# Altium PCB 990130_PCB.PcbDoc
Units mil, origin at the board's own origin, x right, y up, seen from the top; angles counter-clockwise.
Board outline 6000 x 4000 mil, 2 copper layers (Top Layer, Bottom Layer); 36 components, 27 nets, 161 pads, 0 vias.
Unrouted connection lines stored in the file: 57.
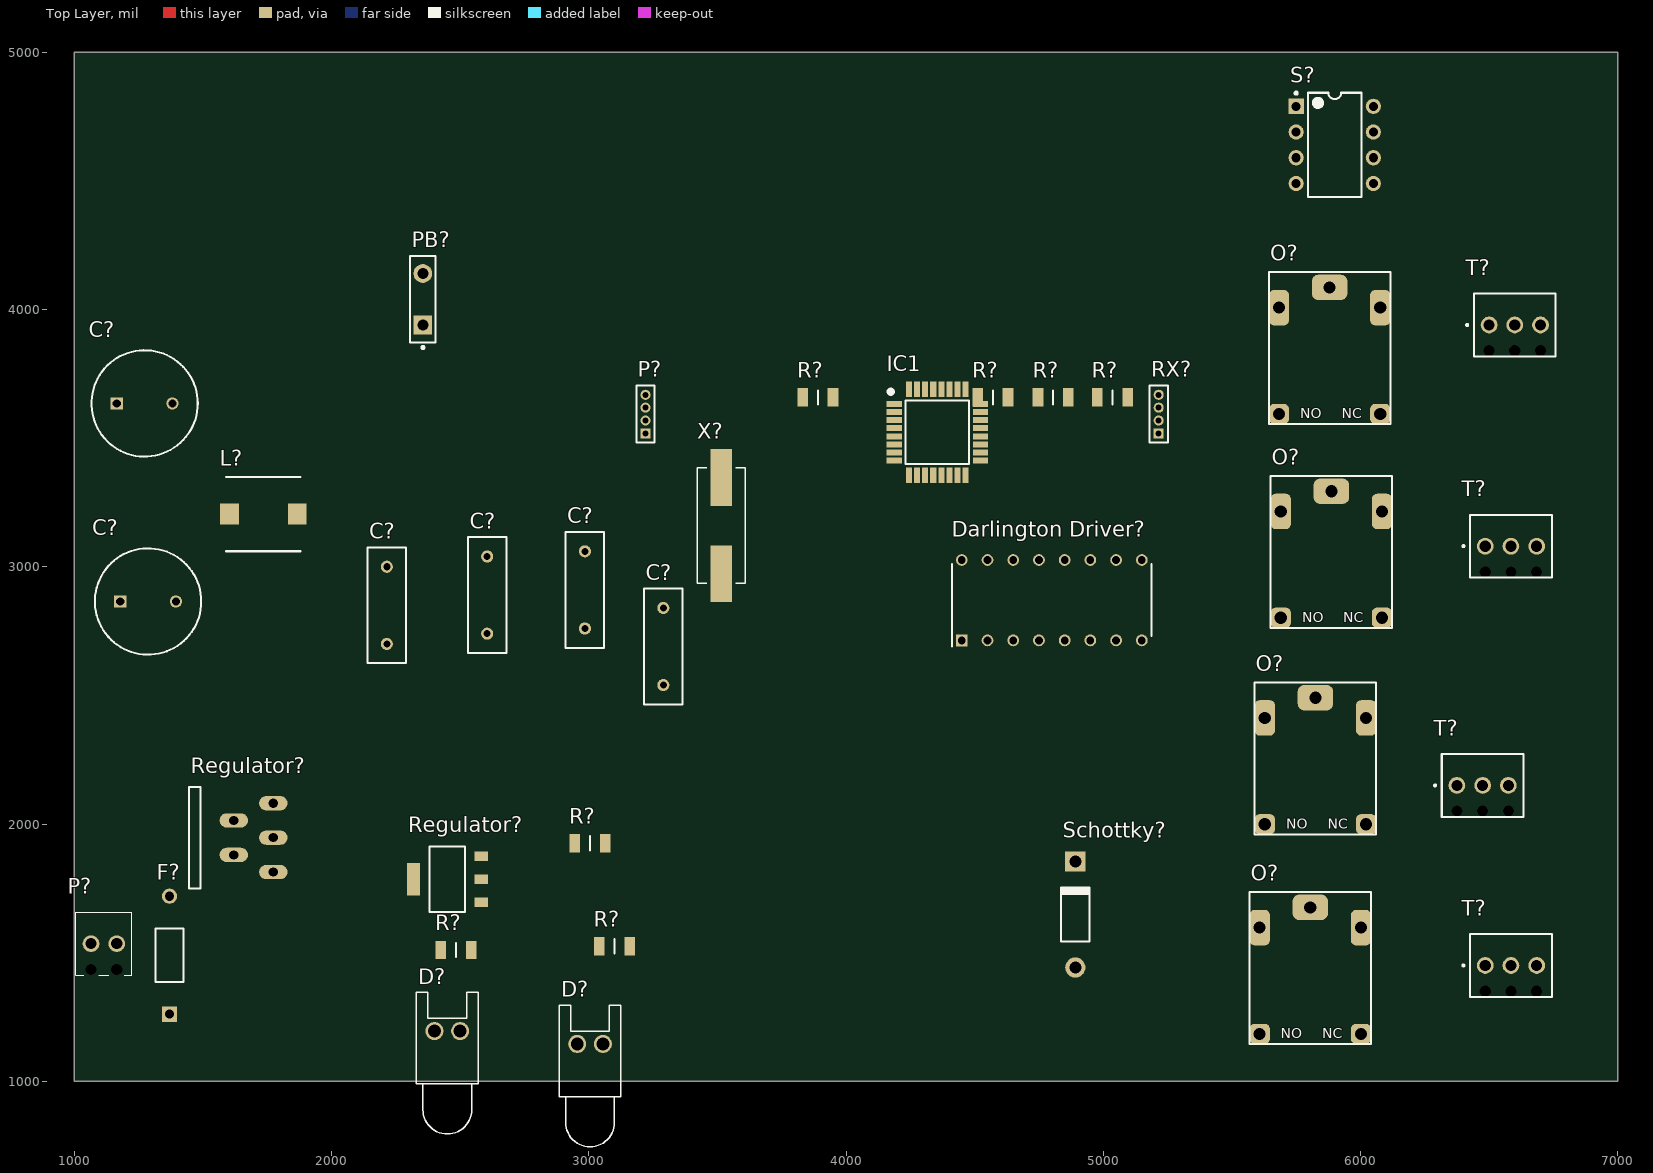
[diagram p0: Top Layer view]
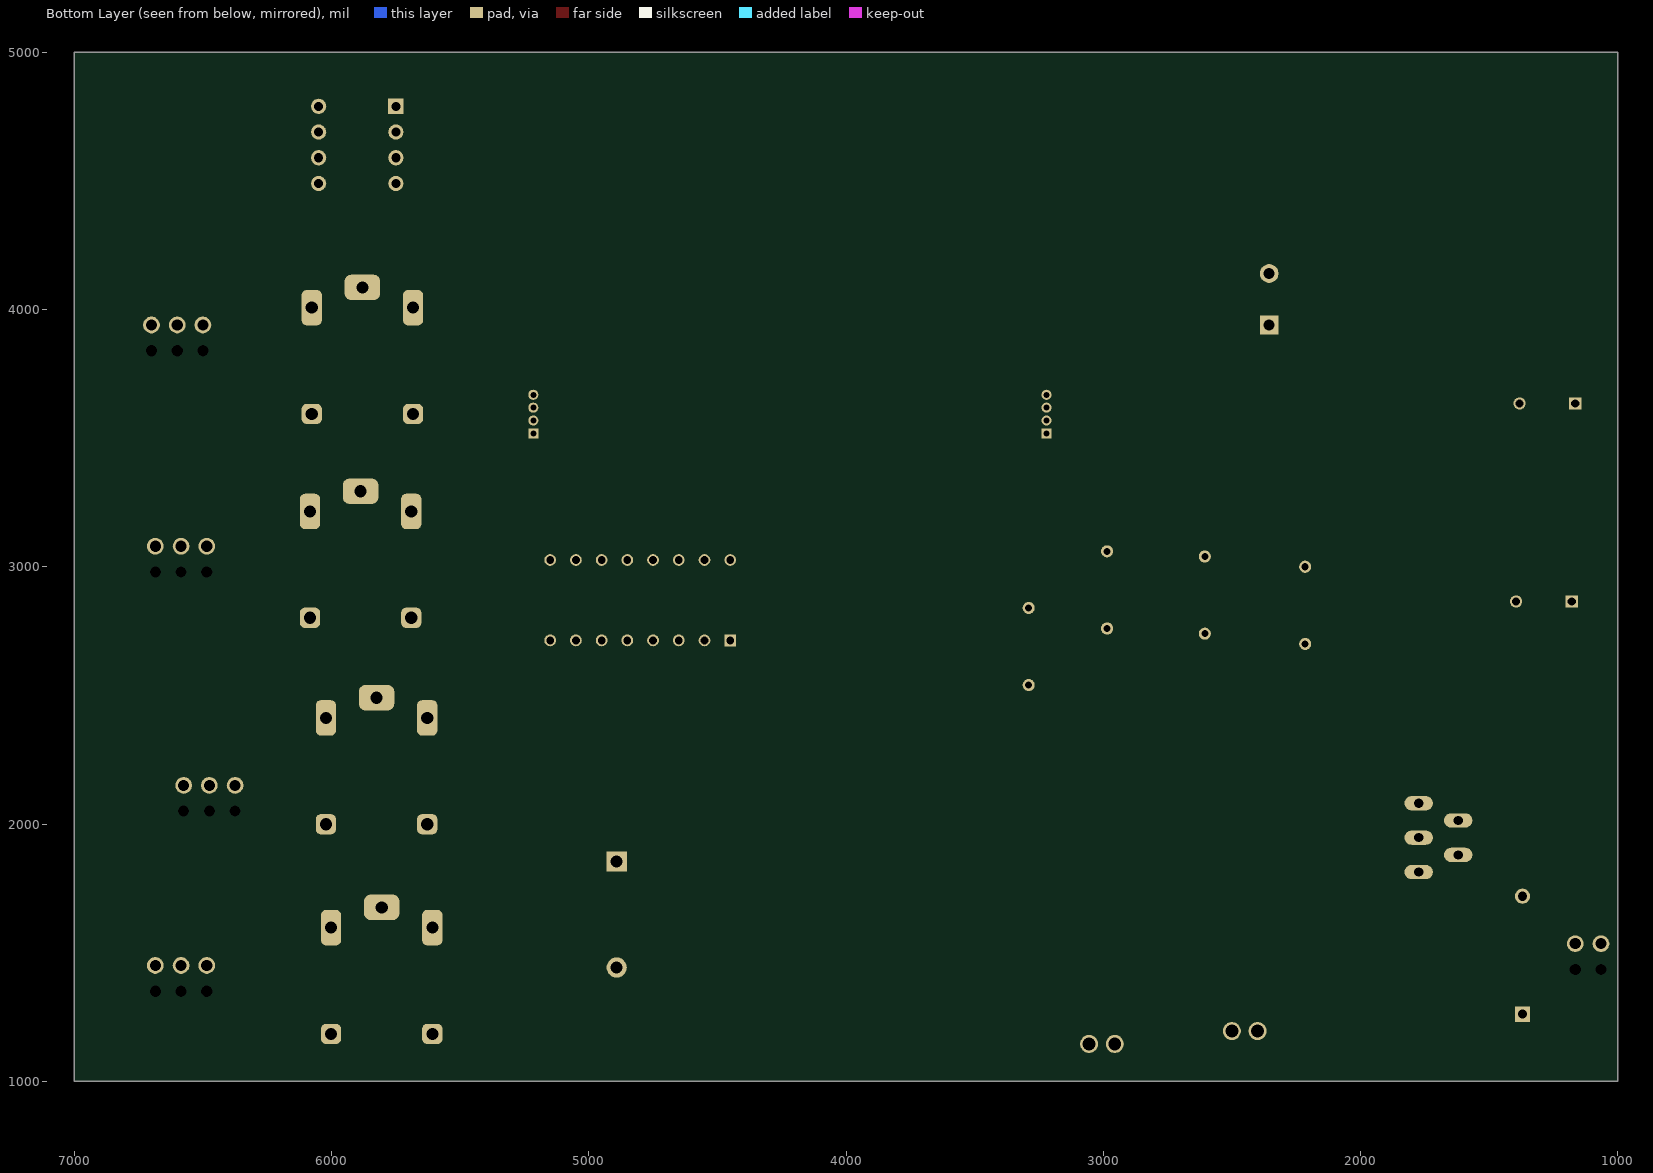
[diagram p1: Bottom Layer view, seen from below]

## Layer stack, top to bottom
Top Solder: solder mask 0.4, Solder Resist, Dk 3.5
Top Layer: signal copper 1.4
Dielectric 1: dielectric 12.6, FR-4, Dk 4.8
Bottom Layer: signal copper 1.4
Bottom Solder: solder mask 0.4, Solder Resist, Dk 3.5

## Board outline
1000,1000 7000,1000 7000,5000 1000,5000

## Design rules (kind name [scope] priority, off if disabled: settings)
Clearance [All] p1: gap=10 ignorepadtopadclearanceinfootprint=FALSE except(0: Arc-Hole Track-Hole SMDPad-Hole THPad-Hole Via-Hole Fill-Hole Poly-Hole Region-Hole Text-Hole)
PolygonConnect [All] p1: connectstyle=Relief reliefconductorwidth=10 reliefentries=4 polygonreliefangle="90 Angle" airgapwidth=10
RoutingVias [All] p1: holewidth=28 width=50 viastyle="Through Hole" minholewidth=28 minwidth=50 maxholewidth=28 maxwidth=50
SolderMaskExpansion [All] p1: expansion=4
Width [All] p1: maxlimit=10 minlimit=10 preferedwidth=10
30 further rules are at their usual default settings.

## Classes and differential pairs
component class 990130_Schematic: C? D? "Darlington Driver?" F? IC1 L? O? P? PB? R? Regulator? RX? S? Schottky? T? X?

## Components (designator, comment, footprint, x,y, rotation, side; value= is the part's Value field where it differs from the comment)
C? "Cap" RAD-0.3 3290,2690 r90 top value=20pF
C? "Cap" RAD-0.3 2985,2910 r90 top value=20pF
C? "Cap" RAD-0.3 2605,2890 r90 top
C? "Cap" RAD-0.3 2215,2850 r90 top value=10pF
C? "1000uF" CAPPRD550W60D1050H2150 1178.46,2865 r0 top
C? "100uF" CAPPRD550W60D1050H2150 1165,3635 r0 top
D? "LED0" LED-0 3005,1145 r0 top
D? "LED0" LED-0 2450,1195 r0 top
"Darlington Driver?" "ULN2003A" DIP794W56P254L1918H533Q16N 4800,2870 r90 top
F? "Fuse 1" PIN-W2/E2.8 1370,1490 r90 top
IC1 "ATMEGA328P-AU" QFP80P900X900X120-32N 4355,3522.95 r0 top
L? "B82472P6152M000" INDPM7474X450N 1735,3205 r0 top
O? "12V SMALL" Relay_5_Small 5805,1430 r0 top
O? "12V SMALL" Relay_5_Small 5825,2245 r0 top
O? "12V SMALL" Relay_5_Small 5880,3840 r0 top
O? "12V SMALL" Relay_5_Small 5886.85,3047.68 r0 top
P? "MHDR1X4" MHDR1X4 3220.55,3518.55 r90 top
P? "INPUT_24V" 1725656 1115,1412.95 r0 top
PB? "SW-PB" SPST-2 2355,4040 r90 top
R? "CRCW120610M0FKEA" RESC3216X60N 3005,1925 r0 top
R? "CRCW120610M0FKEA" RESC3216X60N 5035.55,3658.55 r0 top
R? "CRCW120610M0FKEA" RESC3216X60N 3890.55,3658.55 r0 top
R? "CRCW120610M0FKEA" RESC3216X60N 4570.55,3658.55 r0 top
R? "CRCW120610M0FKEA" RESC3216X60N 4805.55,3658.55 r0 top
R? "1k" RESC3216X60N 2484.06,1510 r0 top
R? "1K" RESC3216X60N 3100,1525 r0 top
Regulator? "AMS1117-3.3" SOT229P700X180-4N 2450,1785 r90 top
Regulator? "LM2576" TO220-5 1442.83,1946.93 r90 top
RX? "MHDR1X4" MHDR1X4 5215.55,3518.55 r90 top
S? "SW-DIP4" DIP-8 5900,4640 r0 top
Schottky? "1N5822" DO-41 4891.69,1647.99 r90 top
T? "1725669" 1725669 6500,3940 r0 top
T? "1725669" 1725669 6485,1450 r0 top
T? "1725669" 1725669 6485,3080 r0 top
T? "1725669" 1725669 6375,2150 r0 top
X? "8.000MHZ" XTAL_ABLS-8.000MHZ-B2-T 3515,3160 r90 top

## Footprints (in the part's own frame and the unit in brackets; to place one, negate y for a bottom-side part, rotate by r counter-clockwise, add the part's x,y. Pads: shape width x height; smd on the part's side, far side on the other; paste and mask are expansions set on the pad)
1725656 [mm]
  round 1.65 hole 1.1: 1(-1.27,3.1) 2(1.27,3.1)
  round 0.55 hole 1.1 unplated: 3(-1.27,0.56) 4(1.27,0.56)
  silkscreen extent -2.77,0 2.77,6.2, body extent -2.77,0 2.77,6.2, height 8
1725669 [mm]
  round 1.65 hole 1.1: 1(0,0) 2(2.54,0) 3(5.08,0)
  round 0.55 hole 1.1 unplated: 4(0,-2.54) 5(2.54,-2.54) 6(5.08,-2.54)
  silkscreen extent -2.26,-3.1 6.58,3.1, body extent -1.5,-3.1 6.58,3.1, height 8.5
CAPPRD550W60D1050H2150 [mm]
  rect 1.2x1.2 hole 0.8: 1(0,0)
  round 1.2 hole 0.8: 2(5.5,0)
  silkscreen extent -2.5,-5.25 8,5.25, body extent -2.5,-5.25 8,5.25, height 21.5
DIP794W56P254L1918H533Q16N [mm]
  rect 1.16x1.16 hole 0.76: 1(-3.97,8.89)
  round 1.16 hole 0.76: 2(-3.97,6.35) 3(-3.97,3.81) 4(-3.97,1.27) 5(-3.97,-1.27) 6(-3.97,-3.81) 7(-3.97,-6.35) 8(-3.97,-8.89) 9(3.97,-8.89) 10(3.97,-6.35) 11(3.97,-3.81) 12(3.97,-1.27) 13(3.97,1.27) 14(3.97,3.81) 15(3.97,6.35) 16(3.97,8.89)
  silkscreen extent -4.55,-9.84 3.55,9.84, body extent -4.11,-9.59 4.11,9.59, height 5.33
DIP-8 [mm] "DIP; 8 Leads; Row Spacing 7.62 mm; Pitch 2.54 mm"
  rect 1.5x1.5 hole 0.9: 1(-3.81,3.81)
  round 1.5 hole 0.9: 2(-3.81,1.27) 3(-3.81,-1.27) 4(-3.81,-3.81) 5(3.81,-3.81) 6(3.81,-1.27) 7(3.81,1.27) 8(3.81,3.81)
  silkscreen extent -3.93,-5.15 2.65,5.23, body extent -3.6,-5.15 3.6,5.15, height 5.08
DO-41 [mm] "Diode, Axial; Body 5.2 x 2.7 mm (LxDia. max), Lead Dia. 0.86 mm (max)"
  round 2 hole 1.2: 1(-5.23,0)
  rect 2x2 hole 1.2: 2(5.23,0)
  silkscreen extent -2.65,-1.4 2.75,1.4
INDPM7474X450N [mm]
  rect 1.85x2.1 smd: 1(-3.35,0) 2(3.35,0)
  silkscreen extent -3.67,-3.67 3.67,3.67, body extent -3.67,-3.67 3.67,3.67, height 4.5
LED-0 [mil] "LED; 2 Leads"
  round 70 hole 50: 1(50,0) 2(-50,0)
  silkscreen extent -120,-400 120,150
MHDR1X4 [mm] "Connector; Header; 4 Position"
  rect 1x1 hole 0.6: 1(0,0)
  round 1 hole 0.6: 2(1.27,0) 3(2.54,0) 4(3.81,0)
  silkscreen extent -0.9,-0.9 4.71,0.9
PIN-W2/E2.8 [mm] "Thru-Hole; 2 Leads"
  rect 1.5x1.5 hole 0.9: 1(-5.825,0)
  round 1.5 hole 0.9: 2(5.825,0)
  silkscreen extent -2.65,-1.4 2.65,1.4
QFP80P900X900X120-32N [mm]
  rect 1.5x0.6 smd: 1(-4.25,2.8) 2(-4.25,2) 3(-4.25,1.2) 4(-4.25,0.4) 5(-4.25,-0.4) 6(-4.25,-1.2) 7(-4.25,-2) 8(-4.25,-2.8) 17(4.25,-2.8) 18(4.25,-2) 19(4.25,-1.2) 20(4.25,-0.4) 21(4.25,0.4) 22(4.25,1.2) 23(4.25,2) 24(4.25,2.8)
  rect 0.6x1.5 smd: 9(-2.8,-4.25) 10(-2,-4.25) 11(-1.2,-4.25) 12(-0.4,-4.25) 13(0.4,-4.25) 14(1.2,-4.25) 15(2,-4.25) 16(2.8,-4.25) 25(2.8,4.25) 26(2,4.25) 27(1.2,4.25) 28(0.4,4.25) 29(-0.4,4.25) 30(-1.2,4.25) 31(-2,4.25) 32(-2.8,4.25)
  silkscreen extent -4.8,-3.15 3.15,4.2, body extent -4.5,-4.5 4.5,4.5, height 1.2
RAD-0.3 [mm] "Radial Cap, Thru-Hole; 2 Leads; 0.3 in Pin Spacing"
  round 1.2 hole 0.7: 1(-3.81,0) 2(3.81,0)
  silkscreen extent -5.71,-1.91 5.71,1.91
Relay_5_Small [mm]
  rrect50% 2x3.5 hole 1.2: 1(5,4.25) 2(-5,4.25)
  rrect50% 3.5x2.5 hole 1.2: Com(0,6.25)
  rrect50% 2x2 hole 1.2: NC(5,-6.25) NO(-5,-6.25)
  silkscreen extent -6,-7.25 6,7.75, body extent -6.13,-7.58 6.17,8.12, height 13.71
RESC3216X60N [mm]
  rect 1.05x1.8 smd: 1(-1.5,0) 2(1.5,0)
  silkscreen extent 0,-0.7 0,0.7, body extent -1.58,-0.8 1.58,0.8, height 0.6
SOT229P700X180-4N [mm]
  rect 0.93x1.31 smd: 1(-2.285,-3.345) 2(0.005,-3.345) 3(2.295,-3.345)
  rect 3.24x1.31 smd: 4(0.005,3.345)
  silkscreen extent -3.25,-1.75 3.25,1.75
SPST-2 [mm] "Switch; 2 Leads"
  rect 1.85x1.85 hole 1.1: 1(-2.54,0)
  round 1.85 hole 1.1: 2(2.54,0)
  silkscreen extent -4.89,-1.27 4.28,1.27
TO220-5 [mm]
  oval 1.408x2.816 hole 0.9: 1(-3.4,-8.4) 2(-1.7,-4.5) 3(0,-8.4) 4(1.7,-4.5) 5(3.4,-8.4)
  silkscreen extent -5,-1.2 5,-0.1
XTAL_ABLS-8.000MHZ-B2-T [mm]
  rect 5.6x2.1 smd: 1(-4.75,0) 2(4.75,0)
  silkscreen extent -5.7,-2.35 5.7,2.35

## Part data
C? C? C? C?: "Capacitor", LatestRevisionDate=17-Jul-2002, LatestRevisionNote="Re-released for DXP Platform.", PackageDescription="Radial Cap, Thru-Hole; 2 Leads; 0.3 in Pin Spacing", PackageReference=RAD-0.3, Published=8-Jun-2000, Publisher="Altium Limited"
C? C?: library part 108CKE025M, "Capacitor Polarised", Manufacturer_Name=Cinch, Datasheet Link=https://componentsearchengine.com/Datasheets/2/108CKE025M.pdf, Height=21.5mm, Manufacturer_Part_Number=108CKE025M
D? D?: "Typical INFRARED GaAs LED", LatestRevisionDate=08-Jul-2005, LatestRevisionNote="Mech Layer 1 removed.", PackageDescription="LED; 2 Leads", PackageReference=LED-0, Published=8-Jun-2000, Publisher="Altium Limited"
"Darlington Driver?": "Integrated Circuit", Manufacturer_Name=STMicroelectronics, Mouser Part Number=511-ULN2003A, RS Part Number=6868209, Allied_Number=70014189, Allied Price/Stock=http://www.alliedelec.com/stmicroelectronics-uln2003a/70014189/, Datasheet Link=http://www.st.com/web/en/resource/technical/document/datasheet/CD00001244.pdf, Height=5.33mm, Manufacturer_Part_Number=ULN2003A, Mouser Price/Stock=https://www.mouser.com/Search/Refine.aspx?Keyword=511-ULN2003A, RS Price/Stock=http://uk.rs-online.com/web/p/products/6868209
F?: "Fuse", LatestRevisionDate=17-Jul-2002, LatestRevisionNote="Re-released for DXP Platform.", PackageDescription="Thru-Hole; 2 Leads", PackageReference=PIN-W2/E2.8, Published=8-Jun-2000, Publisher="Altium Limited"
IC1: "Integrated Circuit", Manufacturer_Name=Microchip, Mouser Part Number=556-ATMEGA328P-AU, RS Part Number=1310271P, Datasheet Link=https://componentsearchengine.com/Datasheets/2/ATMEGA328P-AU.pdf, Height=1.2mm, Manufacturer_Part_Number=ATMEGA328P-AU, Mouser Price/Stock=https://www.mouser.com/Search/Refine.aspx?Keyword=556-ATMEGA328P-AU, RS Price/Stock=http://uk.rs-online.com/web/p/products/1310271P
L?: "Inductor", Manufacturer_Name=EPCOS, Mouser Part Number=871-B82472P6152M000, Datasheet Link=https://www.tdk-electronics.tdk.com/inf/30/db/ind_2008/b82472p6.pdf, Height=4.5mm, Manufacturer_Part_Number=B82472P6152M000, Mouser Price/Stock=https://www.mouser.com/Search/Refine.aspx?Keyword=871-B82472P6152M000
O? O? O?: library part HJR-78F-12VDC-S-Z, Manufacturer=TIANBO, Operating Temp="-40°C to +85°C", Rating="7A, 120VAC", Storage Temp="-40°C to +105°C", Manufacture Part #=HJR-78F-12VDC-S-Z
O?: library part HJR-78F-12VDC-S-Z, Case/Package=LQFP, Frequency=16MHz, Manufacturer=TIANBO, Manufacturer Part Number=STM8S003K3T6C, Max Operating Temperature=85°C, Max Power Dissipation=330mW, Max Supply Voltage=5.5V, Min Operating Temperature=-40°C, Min Supply Voltage=2.95V, Operating Temp="-40°C to +85°C", Package Quantity=250, Rating="7A, 120VAC", Storage Temp="-40°C to +105°C", ComponentLink2Description=http://www.st.com/web/en/resource/technical/document/datasheet/DM00024550.pdf?src-supplier=Future+Electronics, ComponentLink2URL=http://www.st.com/web/en/resource/technical/document/datasheet/DM00024550.pdf?src-supplier=Future+Electronics, ComponentLink3Description=http://www.st.com/web/en/resource/technical/document/datasheet/DM00024550.pdf?src-supplier=Avnet+Europe, ComponentLink3URL=http://www.st.com/web/en/resource/technical/document/datasheet/DM00024550.pdf?src-supplier=Avnet+Europe, ComponentLink4Description=http://www.st.com/web/en/resource/technical/document/datasheet/DM00024550.pdf?src-supplier=Mouser, ComponentLink4URL=http://www.st.com/web/en/resource/technical/document/datasheet/DM00024550.pdf?src-supplier=Mouser, Data Bus Width=8b, Data Rate=8Mbps, Height=1.45mm, Interface=I2C,SPI,IrDA,UART,USART,LIN, Lead Free="Lead Free", Length=7.2mm, Manufacture Part #=HJR-78F-12VDC-S-Z, Max Frequency=16MHz, Memory Size=8KB, Memory Type=FLASH, Mount="Surface Mount", Number of ADC Channels=5, Number of I2C Channels=1, Number of I/Os=28, Number of Pins=32, Number of Programmable I/O=28, Number of SPI Channels=1, Number of Timers/Counters=7, Number of UART Channels=1, Oscillator Type=Internal, Packaging=Tray, Peripherals="Brown-out Detect/Reset,POR,PWM,WDT,I2C", Radiation Hardening=No, RAM Size=1KB, REACH SVHC="No SVHC", Stock 1=0, Supplier 1="Future Electronics", Watchdog Timer=Yes, Width=7.2mm
P? RX?: "Header, 4-Pin", LatestRevisionDate=17-Jul-2002, LatestRevisionNote="Re-released for DXP Platform.", Publisher="Altium Limited"
P?: library part 1725656, "Connector", Manufacturer_Name="Phoenix Contact", Mouser Part Number=651-1725656, RS Part Number=3909023, Allied_Number=70054335, Allied Price/Stock=http://www.alliedelec.com/phoenix-contact-1725656/70054335/, Datasheet Link=https://www.phoenixcontact.com/online/portal/gb?uri=pxc-oc-itemdetail:pid=1725656&library=gben&tab=1, Height=8mm, Manufacturer_Part_Number=1725656, Mouser Price/Stock=https://www.mouser.com/Search/Refine.aspx?Keyword=651-1725656, RS Price/Stock=https://uk.rs-online.com/web/p/products/3909023
PB?: "Switch", LatestRevisionDate=17-Jul-2002, LatestRevisionNote="Re-released for DXP Platform.", PackageDescription="Switch; 2 Leads", PackageReference=SPST-2, Published=24-Mar-1999, Publisher="Altium Limited"
R? R? R? R? R?: "Resistor", Manufacturer_Name=Vishay, Mouser Part Number=71-CRCW1206-10M-E3, Allied_Number=70204450, Allied Price/Stock=https://www.alliedelec.com/vishay-dale-crcw120610m0fkea/70204450/, Height=0.6mm, Manufacturer_Part_Number=CRCW120610M0FKEA, Mouser Price/Stock=https://www.mouser.com/Search/Refine.aspx?Keyword=71-CRCW1206-10M-E3
R? R?: library part CRCW120610M0FKEA, "Resistor", Manufacturer_Name=Vishay, Mouser Part Number=71-CRCW1206-10M-E3, Allied_Number=70204450, Allied Price/Stock=https://www.alliedelec.com/vishay-dale-crcw120610m0fkea/70204450/, Height=0.6mm, Manufacturer_Part_Number=CRCW120610M0FKEA, Mouser Price/Stock=https://www.mouser.com/Search/Refine.aspx?Keyword=71-CRCW1206-10M-E3
Regulator?: library part AMS1117, "Low-dropout regulator", Type=AMS1117-3.3
Regulator?: "Buck Switching Regulator IC Positive Fixed 5V 1 Output 3A TO-263-6, D²Pak _5 Leads + Tab_, TO-263BA", Package="TO-263-6 National Semiconductor", Availability=Unavailable, MF="Texas Instruments", MP=LM2576, Price=None, SnapEDA_Link=https://www.snapeda.com/parts/LM2576/Texas%20Instruments/view-part/214937/?ref=snap
S?: "DIP Switch", LatestRevisionDate=17-Jul-2002, LatestRevisionNote="Re-released for DXP Platform.", PackageReference=DIP-8, Published=24-Mar-1999, Publisher="Altium Limited"
Schottky?: library part "Diode 1N4001", "1 Amp General Purpose Rectifier", Code_JEDEC=DO-204-AL, ComponentLink1Description="Manufacturer Link", ComponentLink1URL=http://www.fairchildsemi.com/, ComponentLink2Description=Datasheet, ComponentLink2URL=http://www.fairchildsemi.com/ds/1N%2F1N4001.pdf, DatasheetVersion=1998, LatestRevisionDate=17-Jul-2002, LatestRevisionNote="Re-released for DXP Platform.", PackageDescription="Diode, Axial; Body 5.2 x 2.7 mm (LxDia. max), Lead Dia. 0.86 mm (max)", PackageReference=DO-41, PackageVersion=Aug-1999, Published=8-Jun-2000, Publisher="Altium Limited"
T? T? T? T?: "Connector", Manufacturer_Name="Phoenix Contact", Mouser Part Number=651-1725669, RS Part Number=3909039, Allied_Number=70054336, Allied Price/Stock=http://www.alliedelec.com/phoenix-contact-1725669/70054336/, Datasheet Link=https://www.phoenixcontact.com/online/portal/gb?uri=pxc-oc-itemdetail:pid=1725669&library=gben&tab=1, Height=8.5mm, Manufacturer_Part_Number=1725669, Mouser Price/Stock=https://www.mouser.com/Search/Refine.aspx?Keyword=651-1725669, RS Price/Stock=https://uk.rs-online.com/web/p/products/3909039
X?: library part ABLS-8.000MHZ-B2-T, "8MHz ±20ppm Crystal 18pF 80 Ohms HC-49/US", Package="HC-49/US Abracon LLC", Availability=Unavailable, MF="Abracon LLC", MP=ABLS-8.000MHZ-B2, Price=None, SnapEDA_Link=https://www.snapeda.com/parts/ABLS-8.000MHZ-B2/Abracon%20LLC/view-part/2753215/?ref=snap

## Nets (pads, with @x,y where several pads share a name; then routed paths per layer and width w, separated by ;. In a path a pad name is that pad's centre, name@x,y a point inside that pad or via, vN(x,y) a via of type N, cw(c..) or ccw(c..) an arc to the next point about the centre after c; other vN are vias at no path point)
3.3V: C?.1@2215,2700 P?.4@3220.55,3668.55 R?.1@2425,1510 R?.1@2945.94,1925 R?.2@3949.61,3658.55 R?.2@4629.61,3658.55 R?.2@4864.61,3658.55 R?.2@5094.61,3658.55 Regulator?.2@2581.69,1785.2
5V: "Darlington Driver?.9" C?.1@1178.46,2865 L?.2 O?.1 R?.1@3040.94,1525 Regulator?.3@2581.69,1875.35 Regulator?.4@1620,2013.86 RX?.4
24V: C?.1@1165,3635 F?.1 P?.2@1165,1535
DATA1: RX?.3
DATA2: RX?.2
GND: "Darlington Driver?.8" C?.1@2985,2760 C?.1@3290,2540 C?.2@1381.54,3635 C?.2@1395,2865 C?.2@2215,3000 C?.2@2605,3040 D?.2 P?.1@1065,1535 P?.2@3220.55,3568.55 PB?.1 Regulator?.1@2581.69,1695.04 Regulator?.3@1773.54,1946.93 Regulator?.5 RX?.1 S?.1 S?.2 S?.3 S?.4 Schottky?.1
NetC?_2: C?.2@3290,2840 X?.2
NetD?_1: D?.1@2500,1195 R?.2@3159.06,1525
"NetDarlington Driver?_13": "Darlington Driver?.13" O?.2@5683.15,4007.32
"NetDarlington Driver?_14": "Darlington Driver?.14" O?.2@5690,3215
"NetDarlington Driver?_15": "Darlington Driver?.15" O?.2@5608.15,1597.32
"NetDarlington Driver?_16": "Darlington Driver?.16" O?.2@5628.15,2412.32
NetF?_2: F?.2 Regulator?.1@1773.54,1813.07
NetL?_1: L?.1 Regulator?.2@1620,1880 Schottky?.2
NetO?_COM: O?.Com@5880,4086.06 T?.2@6600,3940
NetO?_NC: O?.NC@6076.85,3593.94 T?.1@6500,3940
NetO?_NO: O?.NO@5683.15,3593.94 T?.3@6700,3940
NRST: P?.1@3220.55,3518.55 PB?.2
PD4: R?.1@3831.5,3658.55 S?.5
PD5: R?.1@4511.5,3658.55 S?.6
PD6: R?.1@4746.5,3658.55 S?.7
PD7: R?.1@4976.5,3658.55 S?.8
RL1: "Darlington Driver?.1"
RL2: "Darlington Driver?.2"
RL3: "Darlington Driver?.3"
RL4: "Darlington Driver?.4"
SWIM: P?.3@3220.55,3618.55
pads on no net: "Darlington Driver?.5" "Darlington Driver?.6" "Darlington Driver?.7" "Darlington Driver?.10" "Darlington Driver?.11" "Darlington Driver?.12" C?.1@2605,2740 C?.2@2985,3060 D?.1@3055,1145 IC1.1 IC1.2 IC1.3 IC1.4 IC1.5 IC1.6 IC1.7 IC1.8 IC1.9 IC1.10 IC1.11 IC1.12 IC1.13 IC1.14 IC1.15 IC1.16 IC1.17 IC1.18 IC1.19 IC1.20 IC1.21 IC1.22 IC1.23 IC1.24 IC1.25 IC1.26 IC1.27 IC1.28 IC1.29 IC1.30 IC1.31 IC1.32 O?.Com@5805,1676.06 O?.Com@5825,2491.06 O?.Com@5886.85,3293.74 O?.NC@6001.85,1183.94 O?.NC@6021.85,1998.94 O?.NC@6083.7,2801.61 O?.NO@5608.15,1183.94 O?.NO@5628.15,1998.94 O?.NO@5690,2801.61 P?.3@1065,1435 P?.4@1165,1435 R?.2@2543.11,1510 R?.2@3064.06,1925 Regulator?.4@2318.31,1785.2 T?.1@6375,2150 T?.1@6485,1450 T?.1@6485,3080 T?.2@6475,2150 T?.2@6585,1450 T?.2@6585,3080 T?.3@6575,2150 T?.3@6685,1450 T?.3@6685,3080 T?.4 T?.5 T?.6 X?.1

## Text inside footprints (layer, text, board x,y; h text height)
O?: Top Overlay "NO" at 5766,3577 h39.37; Top Overlay "NC" at 5927,3577 h39.37
O?: Top Overlay "NO" at 5772.85,2784.68 h39.37; Top Overlay "NC" at 5933.85,2784.68 h39.37
O?: Top Overlay "NO" at 5691,1167 h39.37; Top Overlay "NC" at 5852,1167 h39.37
O?: Top Overlay "NO" at 5711,1982 h39.37; Top Overlay "NC" at 5872,1982 h39.37